# Allegro board ne555devboard.brd
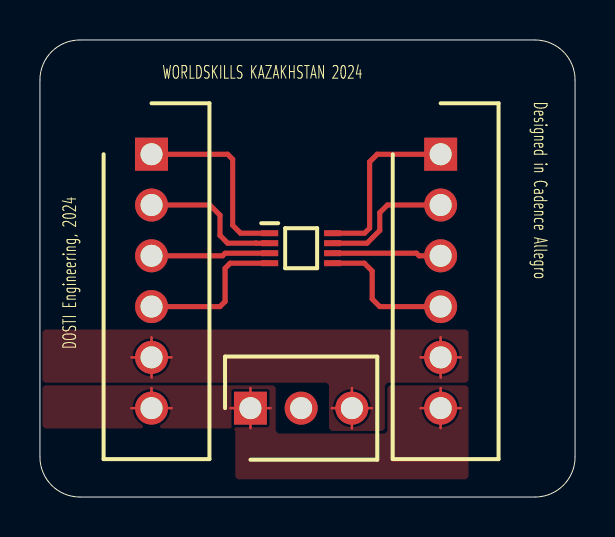
[diagram p0: board, top side]
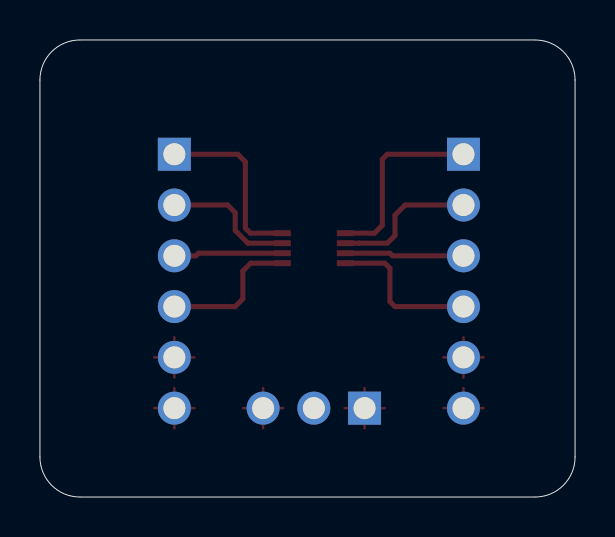
[diagram p1: board, bottom side, seen from below]

Outline 26.8 x 22.86 mm; copper layers: TOP, BOTTOM. Coordinates in mm from the lower left corner of the outline.
Outline path: 0,20.86 0,2 arc(0.59,0.59) 2,0 24.8,0 arc(26.21,0.59) 26.8,2 26.8,20.86 arc(26.21,22.27) 24.8,22.86 2,22.86 arc(0.59,22.27) 0,20.86

## Design rules (mm)
constraint set DEFAULT: min track width 0.127

## Placement (name value [footprint] x y rotation side)
IC1  74LVC1G123DC_125  [SOP50P310X100-8N]  13.08 12.45 0 top
J1  280372-1  [SHDR6W63P0X254_1X6_1780X500X1280P]  20.07 17.15 270 top
J2  280372-1  [SHDR6W63P0X254_1X6_1780X500X1280P]  5.59 17.15 270 top
J3  69167-103  [SHDR3W64P0X254_1X3_762X516X980P]  10.54 4.44 0 top

## Library data of the parts
IC1 = 74LVC1G123DC,125
J1 J2 = 280372-1
J3 = 69167-103

## Footprints (pads in the part's own frame, mm; a bottom-side part is the same pattern mirrored in y, then rotated)
SHDR3W64P0X254_1X3_762X516X980P
  rect 1.65x1.65 hole 1.1: 1(0,0)
  round 1.65 hole 1.1: 2(2.54,0) 3(5.08,0)
SHDR6W63P0X254_1X6_1780X500X1280P
  rect 1.65x1.65 hole 1.1: 1(0,0)
  round 1.65 hole 1.1: 2(2.54,0) 3(5.08,0) 4(7.62,0) 5(10.16,0) 6(12.7,0)
SOP50P310X100-8N
  rect 0.85x0.3 smd: 1(-1.575,0.75) 2(-1.575,0.25) 3(-1.575,-0.25) 4(-1.575,-0.75) 5(1.575,-0.75) 6(1.575,-0.25) 7(1.575,0.25) 8(1.575,0.75)

## Nets
VCC: J1.6 J2.6 J3.1
0: J1.5 J2.5 J3.3
N00131: IC1.8(\VCC\) J1.1
N00135: IC1.7 J1.2
N00139: IC1.6 J1.3
N00143: IC1.5 J1.4
N00147: IC1.1 J2.1
N00151: IC1.2 J2.2
N00155: IC1.3 J2.3
N00159: IC1.4 J2.4

Pads without a net: J3 2

## Routing (per net, layer and track width the routed paths; a pad name or vN(x,y) marks a point on that pad's centre or on a via; arc(x,y) is an arc through that point)
VCC: length 11
  TOP w0.127: 5.59,4.44 5.59,5.45 ; 5.59,4.44 4.58,4.44 ; 5.59,4.44 6.59,4.44 ; 20.07,4.44 21.07,4.44 ; 20.07,4.44 20.07,3.44 ; 20.07,4.44 20.07,5.45 ; 20.07,4.44 19.06,4.44 ; J3.1 11.54,4.44 ; J3.1 10.54,3.44 ; J3.1 10.54,5.45 ; J3.1 9.54,4.44
0: length 12
  TOP w0.127: J2.5 6.59,6.99 ; J2.5 5.59,7.99 ; J2.5 5.59,5.98 ; J2.5 4.58,6.99 ; 15.62,3.44 J3.3 ; J3.3 14.62,4.44 ; J3.3 16.62,4.44 ; J3.3 15.62,5.45 ; J1.5 21.07,6.99 ; J1.5 20.07,7.99 ; J1.5 19.06,6.99 ; J1.5 20.07,5.98
N00131: length 9
  TOP w0.254: IC1.8 16.26,13.2 16.51,13.45 16.51,16.76 16.89,17.15 J1.1
N00135: length 6.7
  TOP w0.254: IC1.7 16.38,12.7 17.02,13.34 17.02,14.22 17.4,14.61 J1.2
N00139: length 5.5
  TOP w0.254: IC1.6 18.86,12.2 18.99,12.06 20.07,12.06
N00143: length 7.1
  TOP w0.254: J1.4 17.02,9.53 16.64,9.91 16.64,11.3 16.24,11.7 IC1.5
N00147: length 9.5
  TOP w0.254: IC1.1 10.04,13.2 9.65,13.59 9.65,16.89 9.4,17.15 J2.1
N00151: length 7.3
  TOP w0.254: J2.2 8.51,14.61 9.02,14.1 9.02,13.08 9.4,12.7 10.82,12.7 10.83,12.7 IC1.2
N00155: length 6
  TOP w0.254: IC1.3 9.27,12.2 9.14,12.06 5.59,12.06
N00159: length 7.8
  TOP w0.254: J2.4 9.02,9.53 9.27,9.78 9.27,11.44 9.52,11.7 IC1.4

## Copper pours and planes (outline as drawn; the poured copper is in the pictures)
VCC on TOP: 0.25,5.59 0.13,5.46 0.13,3.56 0.25,3.43 9.65,3.43 9.78,3.3 9.78,1.02 9.91,0.89 21.34,0.89 21.46,1.02 21.46,5.46 21.34,5.59 17.53,5.59 17.4,5.46 17.4,3.3 17.27,3.18 11.94,3.18 11.81,3.3 11.81,5.46 11.68,5.59
0 on TOP: 21.34,8.38 0.25,8.38 0.13,8.25 0.13,5.84 0.25,5.72 14.35,5.72 14.48,5.59 14.48,3.43 14.6,3.3 17.14,3.3 17.27,3.43 17.27,5.59 17.4,5.72 21.34,5.72 21.46,5.84 21.46,8.25

## Text on the board
Ref Des/Silkscreen Top: DOSTI Engineering, 2024 | Designed in Cadence Allegro
NCLEGEND-1-2: FIGURE | FINISHED_SIZE | 1.1001 | DRILL CHART: TOP to BOTTOM | ALL UNITS ARE IN MILLIMETERS | DRILLED_SIZE | - | PLATED | QTY | 15 | TOTAL HOLES:
